# EAGLE board RoboKit (EAGLE 9.6.2)
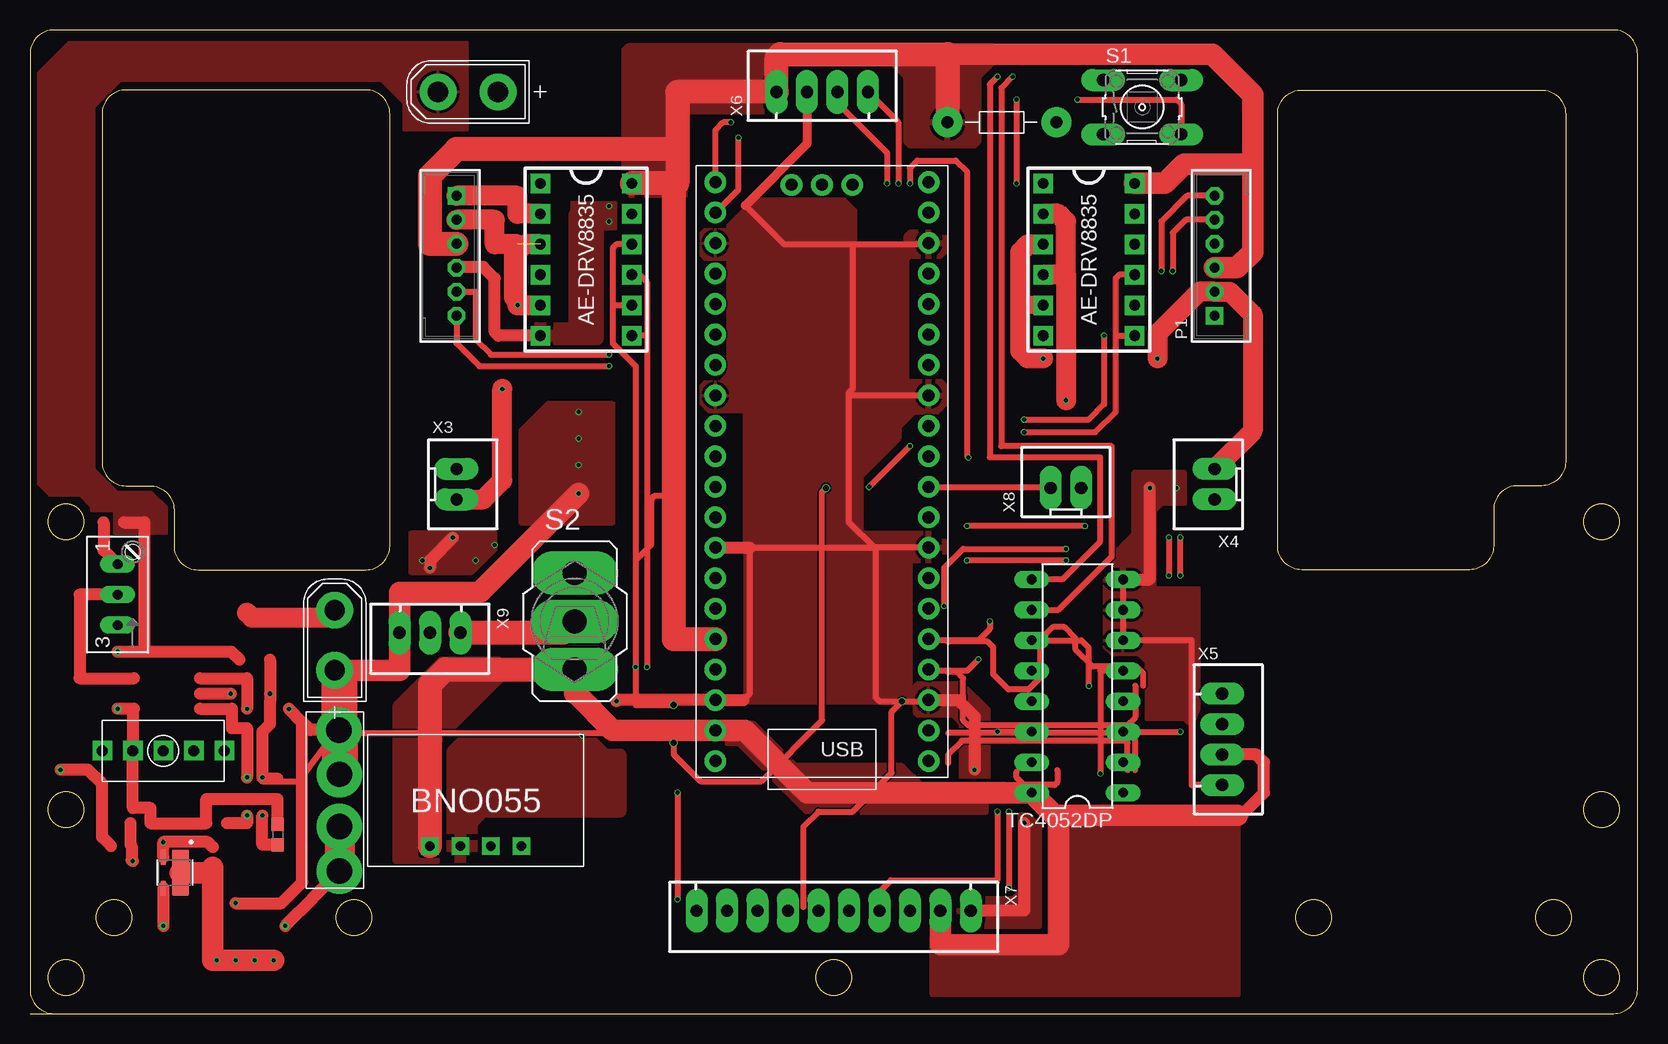
[diagram p0: board, top side]
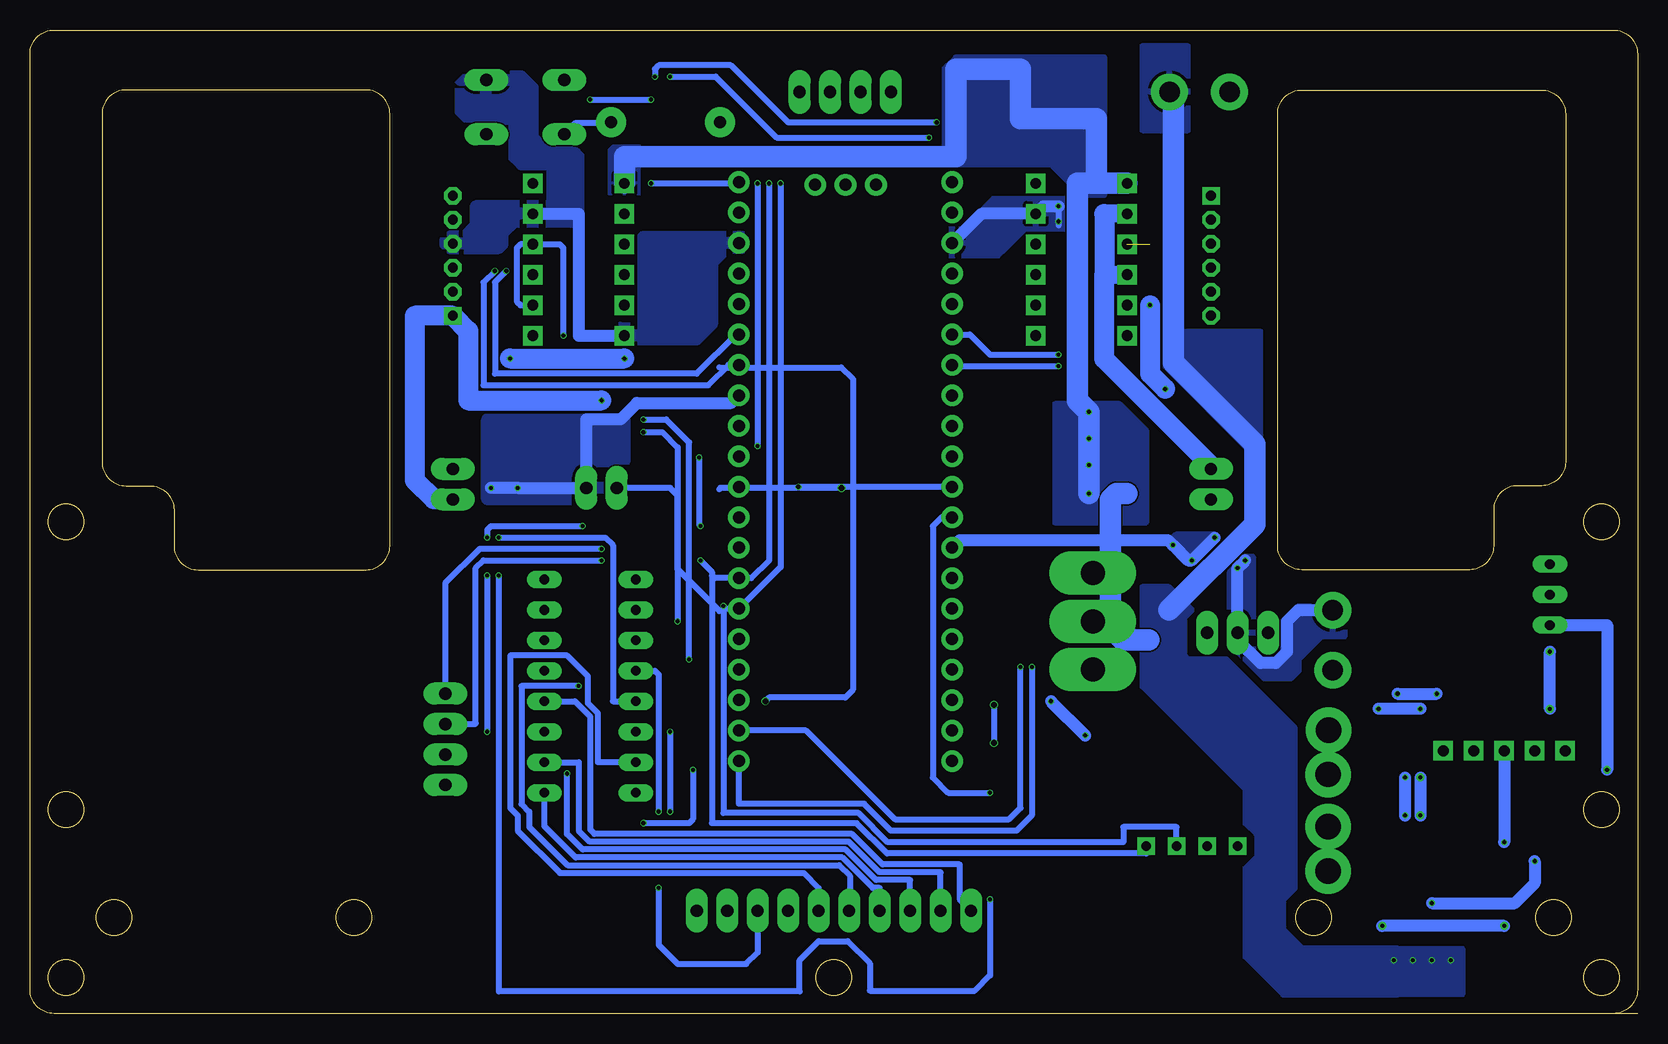
[diagram p1: board, bottom side, seen from below]

Size 134 x 82 mm. Coordinates in mm from the lower left corner, seen from the top.
Outline: 132,0 arc90 134,2
Outline: 134,80 arc90 132,82
Outline: 2,82 arc90 0,80
Outline: 0,2 arc90 2,0
Outline: 2,0 132,0
Outline: 132,0 arc90 134,2
Outline: 134,2 134,80
Outline: 134,80 arc90 132,82
Outline: 132,82 2,82
Outline: 2,82 arc90 0,80
Outline: 0,80 0,2
Outline: 0,2 arc90 2,0
Outline: 0,0 2,0
Outline: 10,44 arc-90 12,42 12,39 arc90 14,37 28,37 arc90 30,39 30,75 arc90 28,77 8,77 arc90 6,75 6,46 arc90 8,44 10,44
Outline: 124,44 arc90 122,42 122,39 arc-90 120,37 106,37 arc-90 104,39 104,75 arc-90 106,77 126,77 arc-90 128,75 128,46 arc-90 126,44 124,44
Outline: circle at 3,3 radius 1.5
Outline: circle at 131,3 radius 1.5
Outline: circle at 3,17 radius 1.5
Outline: circle at 131,17 radius 1.5
Outline: circle at 3,41 radius 1.5
Outline: circle at 131,41 radius 1.5
Outline: circle at 3,3 radius 1.5
Outline: circle at 131,3 radius 1.5
Outline: circle at 3,17 radius 1.5
Outline: circle at 131,17 radius 1.5
Outline: circle at 3,41 radius 1.5
Outline: circle at 131,41 radius 1.5
Outline: circle at 67,3 radius 1.5
Outline: circle at 107,8 radius 1.5
Outline: circle at 127,8 radius 1.5
Outline: circle at 27,8 radius 1.5
Outline: circle at 7,8 radius 1.5
Copper layers (1*16): Top 0.035mm / dielectric 1.6mm / Bottom 0.035mm
Design rules "jlcpcb-2layers": minimum track width 5mil, minimum drill 0.3mm, track to track 5mil, track to pad 5mil, pad to pad 5mil, via to via 5mil, smd to smd 5mil, copper to edge 0.2mm, drill to drill 6mil, minimum pad ring 10mil, minimum via ring 3mil, stop-mask expansion 4mil, vias tented up to drill 0mil, thermal gap 10mil
Net classes: 0 default: width 0.5 mm; 2 power: width 1 mm, drill 0.102 mm

## Footprints (pad centres in the part's own frame; a part is rotated, then mirrored left to right if it is on the bottom)
0603 = smd 1.1 x 1: 1 -0.85,0; 2 0.85,0
XT30UPB-M = drill 1.7: + 2.5,0; - -2.5,0
RESISTER_SOCKET = drill 1 pad 2.5: 1 -4.5,0; 2 4.58,0
B6B-PH-K = drill 0.813 square: 1 -5,0 | drill 0.813 octagon: 2 -3,0; 3 -1,0; 4 1,0; 5 3,0; 6 5,0
S64W = drill 0.813 long: A 2.54,1.27; E -2.54,1.27; S 0,1.27
B3F-10XX = drill 1.016 long: 1 -3.251,2.261; 2 3.251,2.261; 3 -3.251,-2.261; 4 3.251,-2.261
320-916 = drill 2.007 long: 1 0,4.013; 2 0,0; 3 0,-4.013
DIL16 = drill 0.813 long: 1 -8.89,-3.81; 2 -6.35,-3.81; 3 -3.81,-3.81; 4 -1.27,-3.81; 5 1.27,-3.81; 6 3.81,-3.81; 7 6.35,-3.81; 8 8.89,-3.81; 9 8.89,3.81; 10 6.35,3.81; 11 3.81,3.81; 12 1.27,3.81; 13 -1.27,3.81; 14 -3.81,3.81; 15 -6.35,3.81; 16 -8.89,3.81
SSM6J808R = smd 3.8 x 1.4: D 0,0.475 | smd 1.26 x 0.42: G -1.285,-0.95; S 1.285,-0.95
FT_RASPBERRY-PI-PICO_TH = drill 1: 1 -8.55,24.03; 2 -8.55,21.49; 3 -8.55,18.95; 4 -8.55,16.41; 5 -8.55,13.87; 6 -8.55,11.33; 7 -8.55,8.79; 8 -8.55,6.25; 9 -8.55,3.71; 10 -8.55,1.17; 11 -8.55,-1.37; 12 -8.55,-3.91; 13 -8.55,-6.45; 14 -8.55,-8.99; 15 -8.55,-11.53; 16 -8.55,-14.07; 17 -8.55,-16.61; 18 -8.55,-19.15; 19 -8.55,-21.69; 20 -8.55,-24.23; 21 9.23,-24.23; 22 9.23,-21.69; 23 9.23,-19.15; 24 9.23,-16.61; 25 9.23,-14.07; 26 9.23,-11.53; 27 9.23,-8.99; 28 9.23,-6.45; 29 9.23,-3.91; 30 9.23,-1.37; 31 9.23,1.17; 32 9.23,3.71; 33 9.23,6.25; 34 9.23,8.79; 35 9.23,11.33; 36 9.23,13.87; 37 9.23,16.41; 38 9.23,18.95; 39 9.23,21.49; 40 9.23,24.03; GND 0.34,-24; SWCLK -2.2,-24; SWDIO 2.88,-24
AE-DRV8835 = drill 0.9 square: AOUT1 -3.81,3.81; AOUT2 -3.81,-1.27; BOUT1 -3.81,1.27; BOUT2 -3.81,-3.81; GND -3.81,-6.35; INA1 3.81,1.27; INA2 3.81,-3.81; INB1 3.81,-1.27; INB2 3.81,-6.35; MODE 3.81,3.81; VCC 3.81,6.35; VIN -3.81,6.35
AE-BNO055-BO = drill 0.8 square: GND -1.27,-3.81; SCL 3.81,-3.81; SDA 1.27,-3.81; VIN -3.81,-3.81
FUSE = drill 2.1: 1 -5.85,0.35; 2 -2.15,0.4; 3 2.2,0.4; 4 5.9,0.4
SW = drill 0.9 square: 1 0,2.54; 2 0,0; 3 0,-2.54; NC 0,5.08; NC2 0,-5.08
JST-XH-02-PACKAGE-LONG-PAD = drill 1.016 long: 1 -1.27,0; 2 1.27,0
JST-XH-04-PACKAGE-LONG-PAD = drill 1.016 long: 1 -3.81,0; 2 -1.27,0; 3 1.27,0; 4 3.81,0
JST-XH-10-PACKAGE-LONG-PAD = drill 1.016 long: 1 -11.43,0; 2 -8.89,0; 3 -6.35,0; 4 -3.81,0; 5 -1.27,0; 6 1.27,0; 7 3.81,0; 8 6.35,0; 9 8.89,0; 10 11.43,0
JST-XH-03-PACKAGE-LONG-PAD = drill 1.016 long: 1 -2.54,0; 2 0,0; 3 2.54,0

## Placement (x,y rotation side)
C2  1uF  [C0603]  9.21,15.88 0 top
C7  0.1uF  [0603]  20.64,14.92 270 top
C11  1uF  [C0603]  15.56,15.88 180 top
CON1  XT30UPB-M  [XT30UPB-M]  25.4,31.11 270 top
CON2  XT30UPB-M  [XT30UPB-M]  36.51,76.83 0 top
CONNECTOR1  RESISTER  [RESISTER_SOCKET]  80.96,74.3 0 top
P1  B6B-PH-K  [B6B-PH-K]  98.74,63.18 90 top
P2  B6B-PH-K  [B6B-PH-K]  35.56,63.18 270 top
R1  20k  [0603']  7.62,13.97 0 top
R2  10k  [0603']  20.64,18.73 90 top
R3  2k  [0603']  6.99,40.96 0 top
R4  20k  [0603']  15.24,13.02 270 top
R5  1k  [S64W]  8.57,34.92 90 top
S1  [B3F-10XX]  92.71,75.56 0 top
S2  [320-916]  45.4,32.7 0 top
TC4052DP  [DIL16]  87.31,27.3 90 top
U1  SSM6J808R  [SSM6J808R]  12.06,11.75 270 top
U$1  RASPBERRY-PI-PICO_TH  [FT_RASPBERRY-PI-PICO_TH]  66.36,45.09 180 top
U$2  AE-DRV8835  [AE-DRV8835]  46.35,62.87 0 top
U$3  AE-DRV8835  [AE-DRV8835]  88.27,62.87 0 top
U$4  [AE-BNO055-BO]  37.15,17.78 0 top
U$5  M51957  [SOP-8]  11.43,27.3 0 top
U$6  BSC093N04LSGATMA1  [MOSFET_BSC093N04LSGATMA1]  18.1,32.38 0 top
U$7  FUSE  [FUSE]  25.4,17.78 270 top
U$9  SW  [SW]  11.11,21.91 90 top
X3  JST-XH-02-PIN-LONG-PAD  [JST-XH-02-PACKAGE-LONG-PAD]  35.56,44.13 270 top
X4  JST-XH-02-PIN-LONG-PAD  [JST-XH-02-PACKAGE-LONG-PAD]  98.74,44.13 90 top
X5  JST-XH-04-PIN-LONG-PAD  [JST-XH-04-PACKAGE-LONG-PAD]  99.38,22.86 270 top
X6  JST-XH-04-PIN-LONG-PAD  [JST-XH-04-PACKAGE-LONG-PAD]  66.04,76.83 0 top
X7  JST-XH-10-PIN-LONG-PAD  [JST-XH-10-PACKAGE-LONG-PAD]  66.99,8.57 180 top
X8  JST-XH-02-PIN-LONG-PAD  [JST-XH-02-PACKAGE-LONG-PAD]  86.36,43.81 0 top
X9  JST-XH-03-PIN-LONG-PAD  [JST-XH-03-PACKAGE-LONG-PAD]  33.34,31.75 180 top

## Library data of the parts
C2 C11 CONNECTOR1 = resistor
C7 = SparkFun-Capacitors; PROD_ID: CAP-08280
CON1 CON2 = XTn0 amass
P1 P2 = con-jst-ph
R1 R4 = SparkFun-Resistors; PROD_ID: RES-00824
R2 R3 = SparkFun-Resistors; PROD_ID: RES-07856
R5 = Values of parts
S1 = switch-omron; MPN: B3F-1000; OC_FARNELL: 176432; OC_NEWARK: 36M3542
S2 = switch
TC4052DP = ic-package
U1 = SSM6J808R; A1_MIN: 0.8; A_MAX: 0.8; A_MIN: 0.8; A_NOM: 0.8; B_MAX: 0.41; B_MIN: 0.43; B_NOM: 0.42; D2_MAX: 0.0; D_MAX: 2.7; D_MIN: 3.1; D_NOM: 2.9; E1_MAX: 2.1; E1_MIN: 2.3; E1_NOM: 2.2; E2_MAX: 0.0; ENOM: 0.95; E_MAX: 2.7; E_MIN: 2.9; E_NOM: 2.8; L_MAX: 0.4; L_MIN: 0.2; L_NOM: 0.3; MANUFACTURER: Toshiba; PIN_COUNT: 6.0; STANDARD: IPC 7351B
U$1 = pipico
U$2 U$3 = AE-DRV8835
U$4 = AE-BNO055
U$5 = M51957B
U$6 = MOSFET_BSC093N04LSGATMA1
U$7 = fuse
U$9 = akizuki sw
X3-X9 = Rembrandt Electronics - JST XH Connectors v1-0

## Nets
0X: TC4052DP.12 X7.3
0Y: TC4052DP.1 X7.7
1X: TC4052DP.14 X7.4
1Y: TC4052DP.5 X7.8
2X: TC4052DP.15 X7.5
2Y: TC4052DP.2 X7.9
3V3 [power]: CONNECTOR1.1 P1.3 P2.3 U$1.36 U$2.VCC U$3.VCC X6.1
3V3_EN [power]: U$1.37
3X: TC4052DP.11 X7.6
3Y: TC4052DP.4 X7.10
5.0V [power]: S2.2 X9.1
A: TC4052DP.10 U$1.21
ANALOG: U$1.34 X1.3
B: TC4052DP.9 U$1.22
GND: CON1.- P1.4 P2.4 S1.2 TC4052DP.6 TC4052DP.7 TC4052DP.8 U$1.3 U$1.8 U$1.13 U$1.18 U$1.23 U$1.28 U$1.33 U$1.38 U$2.GND U$2.MODE U$3.GND U$3.MODE U$4.GND U$6.D X5.4 X6.2 X7.1 X8.2 X9.2
HALL_A_L: P2.5 U$1.26
HALL_A_R: P1.5 U$1.14
HALL_B_L: P2.6 U$1.27
HALL_B_R: P1.6 U$1.15
IO0: U$1.1 U$2.INA1 U$2.INA2
IO1: U$1.2 U$2.INB1 U$2.INB2
IO2: U$1.4 U$3.INA1 U$3.INA2
IO3: U$1.5 U$3.INB1 U$3.INB2
IO6: U$1.9
IO7: U$1.10 X8.1
IO8: U$1.11
IO9: U$1.12
IO12: U$1.16
IO12: U$1.16
IO13: U$1.17
IO14: R2.2 U$1.19
IO15: S1.4 U$1.20
IO16: U1.10 U$1.21
IO17: U1.11 U$1.22
IO18: U1.14 U$1.24
IO19: U1.13 U$1.25
IO20: U$1.26 X8.1
IO21: U$1.29
MOTOR_A_L: P2.1 U$2.AOUT1 U$2.AOUT2 X3.1
MOTOR_A_R: P1.1 U$3.AOUT1 U$3.AOUT2 X4.1
MOTOR_B_L: P2.2 U$2.BOUT1 U$2.BOUT2 X3.2
MOTOR_B_R: P1.2 U$3.BOUT1 U$3.BOUT2 X4.2
N$1: R5.S U$5.IN
N$1: C2.2 C11.2 CON2.- LED1.A R2.1 R3.2 U$9.1
N$2: R3.1 R5.A
N$2: CONNECTOR1.2 S2.3
N$3: R1.1 R5.E
N$4: CONNECTOR1.2 S1.3
N$5: C11.1 U$5.C
N$6: C7.2 R2.2 U$5.OUT U$6.GATE
N$7: R4.1 U1.G U$9.2
N$11: U1.23
N$12: U1.22
N$13: U1.21
N$14: U1.20
N$15: U1.19
N$16: U1.18
N$17: U1.17
N$18: U1.16
N$19: CONNECTOR4.2 U1.1
RUN: S3.4 U$1.30
SCL: U$1.7 U$4.SCL X5.2 X6.4
SDA: U$1.6 U$4.SDA X5.1 X6.3
V_HIGH [power]: U1.S U$7.3 U$7.4
VBUS [power]: U$1.40
VIN [power]: CON2.+ R4.2 U1.D
VOUT [power]: C2.1 CON1.+ R1.2 U$2.VIN U$3.VIN U$5.V U$7.1 U$7.2 X9.3
VSYS [power]: S2.3 TC4052DP.16 U$1.39 U$4.VIN X5.3 X7.2
X-COM: TC4052DP.13 U$1.32
Y-COM: TC4052DP.3 U$1.31

## Tracks (layer width: path | path; a pad name or v marks a point on that pad's centre or on a via)
0X  (via drill 0.35)
  Top 0.5: v81.6,16.83 v81.6,10.48
  Bottom 0.5: TC4052DP.12 81.92,28.57 81.6,28.26 v81.6,16.83 | X7.3 73.34,5.08 74.3,4.13 80.01,4.13 81.6,5.71 v81.6,10.48
0Y
  Bottom 0.5: X7.7 63.18,10.47 63.73,10.47 66.27,13.02 88.52,13.02 91.12,15.62 TC4052DP.1
1X  (via drill 0.35)
  Top 0.5: TC4052DP.14 v80.64,23.5 | v80.64,16.83 80.64,11.11 71.75,11.11 70.8,10.16 X7.4
  Bottom 0.5: v80.64,23.5 v80.64,16.83
1Y  (via drill 0.35)
  Top 0.5: TC4052DP.5 89.22,28.57 v89.22,20
  Bottom 0.5: X7.8 60.64,11.13 63.46,11.13 66,13.67 87.93,13.67 89.23,14.97 89.23,19.98 v89.22,20
2X
  Bottom 0.5: TC4052DP.15 86.66,20.95 86.66,25.04 87.48,25.86 87.48,28.11 89.22,29.84 93.96,29.84 93.96,17.13 93.34,16.51 93.34,15.24 89.82,11.71 69.5,11.71 68.26,10.48 X7.5
2Y
  Bottom 0.5: X7.9 58.1,11.75 58.13,11.78 63.19,11.78 65.73,14.32 87.34,14.32 88.27,15.24 88.27,20.95 TC4052DP.2
3V3
  Top 1.8: 101.92,70.8 96.2,70.8 94.61,69.22 U$3.VCC | 76.52,79.98 98.55,79.98 101.92,76.62 101.92,70.8 | P1.3 100.6,62.18 101.92,63.5 101.92,70.8
  Top 2: 53.98,72.07 53.98,76.83 X6.1 62.23,79.69 62.52,79.98 76.52,79.98 76.52,74.35 CONNECTOR1.1 | 53.98,72.07 53.98,69.22 53.66,69.22 | 53.66,69.22 53.66,31.21 U$1.36 | 53.66,69.22 U$2.VCC | 53.98,72.07 35.56,72.07 33.34,69.85 33.34,64.18 P2.3
  pour Top: 49.53,68.26 54.61,68.26 54.61,75.25 62.87,75.25 62.87,80.64 49.85,80.64 49.53,80.33
  pour Top: 71.75,80.64 71.75,79.38 72.39,78.74 73.03,78.11 73.03,72.71 73.34,72.39 78.74,72.39 79.06,72.71 79.06,78.11 80.33,79.38 80.33,80.64
3X  (via drill 0.35)
  Top 0.5: v88.27,27.3 88.27,30.48 87.63,31.11 TC4052DP.11
  Bottom 0.5: v88.27,27.3 93.03,27.3 93.03,17.46 92.39,16.83 92.39,15.56 89.2,12.36 66.54,12.36 65.67,11.49 65.67,8.63 X7.6
3Y
  Bottom 0.5: X7.10 56.52,9.53 56.52,12.43 62.92,12.43 65.46,14.97 86.94,14.97 87.31,15.34 87.31,24.77 88.58,26.04 TC4052DP.4
5.0V
  Top 2: S2.2 44.45,31.75 X9.1
A  (via drill 0.35)
  Top 0.5: v81.92,78.11 80.96,77.15 80.96,47.31 90.17,47.31 90.17,38.1 85.72,33.66 TC4052DP.10 | v58.42,74.3 57.78,74.3 57.13,73.64 U$1.21
  Bottom 0.5: v81.92,78.11 81.92,78.74 81.6,79.06 75.56,79.06 70.8,74.3 v58.42,74.3
ANALOG  (via drill 0.5)
  Top 0.48: 64.45,15.56 64.45,8.89
  Top 0.5: 64.45,15.56 65.72,16.83 68.58,16.83 71.83,20.08 71.83,25.16 v72.71,26.04
  Bottom 0.48: 76.54,53.88 66.36,53.88
  Bottom 0.5: 66.36,53.88 65.41,52.92 65.41,26.98 66.04,26.34 72.4,26.34 v72.71,26.04
B  (via drill 0.35)
  Top 0.5: U$1.22 59.05,68.7 v59.05,73.03 | v80.64,78.11 80.01,77.47 80.01,46.35 89.22,46.35 89.22,39.37 86.04,36.2 TC4052DP.9
  Bottom 0.5: v80.64,78.11 76.83,78.11 71.75,73.03 v59.05,73.03
GND  (via drill 0.35)
  Top 0.5: 59.63,67.37 62.87,64.14 68.58,64.14 | U$1.18 74.81,64.14 68.58,64.14 | 68.58,64.14 68.58,52.07 68.26,51.75 | U$1.13 68.48,51.53 68.26,51.75 | U$1.8 70.39,38.84 | 70.39,38.84 68.26,40.96 68.26,51.75 | 70.39,38.84 60.01,38.84 60.01,26.67 59.47,26.14 | 70.39,38.84 70.48,38.73 70.48,26.35 70.8,26.04 74.81,26.04 U$1.3 | X5.4 96.84,19.05 96.84,31.11 TC4052DP.6 TC4052DP.8
  Top 0.75: 59.63,67.37 64.77,72.51 X6.2
  Top 1: U$2.GND 39.05,56.52 38.73,56.83 38.73,61.28 37.78,62.23 35.61,62.23 P2.4 | TC4052DP.8 93.34,36.2 v93.34,43.81 | v48.9,26.04 48.99,26.14 U$1.38 59.47,26.14 | U$1.3 77.37,26.14 78.74,24.77 v78.74,20.32 | v82.87,15.88 82.87,8.57 X7.1 | v33.34,37.15 33.34,37.78 v35.24,39.69 | U$1.33 60.01,38.84
  Top 1.65: 18.1,33.44 18.51,33.02 24.8,33.02 CON1.-
  Bottom 0.5: v78.74,20.32 78.74,16.19 79.06,15.88 v82.87,15.88 | v48.26,67.31 v48.26,66.04 48.26,65.72
  Bottom 1: U$3.MODE 88.27,66.67 88.27,56.52 U$3.GND | U$1.23 54.69,66.67 U$2.MODE 49.53,67.31 v48.26,67.31 | U$1.33 56.49,39.47 39.15,39.47 v38.73,39.05 37.47,37.78 v37.15,37.78 v35.24,39.69 | CON1.- 28.3,33.62 29.21,32.7 29.21,30.16 30.16,29.21 31.43,29.21 33.34,31.11 X9.2 v33.34,37.15 v32.7,37.78 | v48.9,26.04 v46.04,23.18 | U$1.13 75.54,50.9 83.4,50.9 84.77,49.53 87.63,49.53 X8.2 v93.34,43.81 v95.57,43.81
  pour Top: 55.88,64.77 55.88,63.18 56.2,62.87 58.1,62.87 58.1,53.34 57.78,53.02 57.47,52.7 56.2,52.7 55.88,52.39 55.88,50.8 56.52,50.16 59.05,50.16 68.9,50.16 68.9,66.99 67.94,67.94 60.33,67.94 59.05,66.67 58.1,65.72 58.1,65.41 56.2,65.41 55.88,65.09
  pour Top: 96.84,23.81 96.2,24.45 93.03,24.45 93.03,29.21 92.39,29.84 90.17,29.84 89.53,30.48 89.53,36.2 90.17,36.83 92.08,36.83 92.39,36.51 93.34,35.56 97.47,35.56 97.47,25.4
  pour Bottom: 88.58,71.75 90.81,71.75 92.08,73.03 92.08,77.15 93.03,78.11 97.47,78.11 98.11,77.47 98.11,75.25 97.47,74.61 93.66,74.61 93.66,71.44 93.03,70.8 90.49,70.8 90.49,67.63 90.81,67.31 92.71,67.31 93.03,66.99 93.03,66.36 92.71,66.04 88.27,66.04 88.27,71.44
  pour Bottom: 91.12,67.31 96.84,67.31 96.84,65.72 97.79,64.77 99.06,64.77 99.38,64.45 99.38,64.14 99.06,63.82 94.93,63.82 94.61,64.14 94.61,65.09 93.66,66.04 91.12,66.04
  pour Bottom: 78.42,56.2 84.77,56.2 84.77,57.15 83.5,57.15 82.87,57.78 82.87,64.77 74.61,64.77 74.61,63.82 75.88,63.82 77.15,62.55 77.15,57.47
  pour Bottom: 86.68,46.04 86.68,42.86 95.89,42.86 95.89,49.53 84.45,49.53 84.45,46.04
  pour Top: 45.4,66.67 47.31,66.67 47.31,56.2 42.23,56.2 42.23,57.15 45.4,57.15
  pour Top: 35.24,13.02 35.24,21.91 39.37,26.04 39.69,26.35 43.18,26.35 47.94,21.59 49.21,21.59 49.21,16.83 37.78,16.83 36.83,15.88 36.83,13.02
  pour Top: 77.47,8.57 77.47,7.3 84.14,7.3 84.14,15.56 83.19,16.51 82.55,16.51 82.55,10.16 81.92,9.53 77.47,9.53
  pour Top: 89.68,35.56 90.05,37.98 92.08,40.01 92.08,45.09 96.2,45.09 96.2,42.55 94.3,42.55 93.66,41.91 93.66,35.56
  pour Top: 73.66,27.3 73.66,25.08 73.98,24.77 76.83,24.77 77.47,24.13 77.47,19.68 80.01,19.68 80.01,25.4 77.79,27.62 73.98,27.62
  pour Bottom: 24.45,31.43 26.35,31.43 28.26,29.53 28.26,28.57 28.89,27.94 31.11,27.94 33.97,30.8 33.97,36.83 32.7,38.1 32.07,38.1 32.07,30.16 31.43,29.53 30.48,29.53 30.16,29.53 29.53,30.16 29.53,32.7 28.26,33.97 24.45,33.97
  pour Top: 31.75,36.83 36.83,36.83 38.73,38.73 38.73,40.01 31.75,40.01
  pour Bottom: 46.99,65.41 51.12,65.41 52.7,63.82 53.34,63.18 57.78,63.18 57.78,65.41 56.2,65.41 53.66,67.94 46.99,67.94
  pour Bottom: 38.42,39.69 38.42,38.73 37.47,37.78 37.15,37.78 35.24,39.69
  pour Top: 65.41,64.14 73.03,64.14 73.03,51.44 73.03,49.85 65.09,49.85 65.09,63.82
  pour Top: 73.03,52.7 75.88,52.7 76.2,52.39 76.2,51.12 76.2,50.8 75.88,50.48 75.56,50.16 73.66,50.16 73.34,49.85 72.71,49.85 72.71,52.7
  pour Top: 73.03,62.87 73.34,63.18 75.88,63.18 76.2,63.5 76.2,64.77 75.88,65.09 73.34,65.09 73.03,64.77
  pour Top: 68.58,50.16 73.66,50.16 72.39,48.9 72.39,47.94 69.22,44.77 69.22,38.73 59.69,38.73 59.69,50.16
  pour Top: 69.53,40.01 75.56,40.01 76.2,39.37 76.2,38.42 75.56,37.78 69.53,37.78
  pour Top: 59.69,38.73 59.69,26.04 73.34,26.04 73.34,38.73
  pour Top: 45.09,67.63 45.09,65.41 48.9,65.41 48.9,67.63
HALL_A_L  (via drill 0.35)
  Top 0.5: P2.5 37.15,60.18 37.15,56.2 38.42,54.93 v48.26,54.93
  Bottom 0.5: U$1.26 55.66,56.62 53.98,54.93 v48.26,54.93
HALL_A_R  (via drill 0.35)
  Top 0.5: v95.25,61.91 95.25,65.09 96.34,66.18 P1.5
  Bottom 0.5: U$1.14 75.78,54.08 77.47,52.39 96.2,52.39 96.2,60.96 v95.25,61.91
HALL_B_L  (via drill 0.35)
  Top 0.5: P2.6 35.56,55.88 37.47,53.98 v48.26,53.98
  Bottom 0.5: U$1.27 57.03,53.98 v48.26,53.98
HALL_B_R  (via drill 0.35)
  Top 0.5: v94.3,61.91 94.3,66.04 96.44,68.18 P1.6
  Bottom 0.5: U$1.15 75.15,56.62 78.42,53.34 95.25,53.34 95.25,60.96 v94.3,61.91
IO0  (via drill 0.35)
  Top 0.5: U$2.INA1 48.9,64.14 48.58,63.82 48.58,59.05 | 48.58,59.05 U$2.INA2 | 48.58,59.05 48.58,55.88 50.48,53.98 v50.48,28.89
  Bottom 0.5: v50.48,28.89 50.48,16.51 51.75,15.24 62.23,15.24 64.47,17.48 74.91,17.48 U$1.1
IO1  (via drill 0.35)
  Top 0.5: U$2.INB1 50.8,61.59 51.44,60.96 51.44,56.52 | 51.44,56.52 U$2.INB2 | 51.44,56.52 v51.44,28.89
  Bottom 0.5: U$1.2 69.31,23.59 61.91,16.19 52.39,16.19 51.44,17.14 v51.44,28.89
IO2  (via drill 0.35)
  Top 0.5: v89.53,56.52 89.53,50.8 88.27,49.53 v82.87,49.53 | v79.06,29.53 78.11,28.57 75.01,28.57 U$1.4
  Bottom 0.5: U$3.INA2 93.11,59.05 93.43,59.37 93.43,63.82 93.11,64.14 U$3.INA1 89.85,64.14 89.53,63.82 v89.53,56.52 | v82.87,49.53 80.96,49.53 79.06,47.62 v79.06,29.53
IO3  (via drill 0.35)
  Top 0.5: U$3.INB1 90.81,61.59 90.49,61.28 90.49,56.52 | 90.49,56.52 U$3.INB2 | v82.87,48.46 88.78,48.46 90.49,50.16 90.49,56.52 | v80.01,32.7 80.01,32.07 79.06,31.11 75.01,31.11 U$1.5
  Bottom 0.5: v82.87,48.46 81.28,48.46 80.01,47.19 v80.01,32.7
IO7
  Top 0.5: U$1.10 84.99,43.91 X8.1
IO14
  Top 0.5: 58.76,23.39 33.97,23.39 33.69,23.39 25.4,23.39 22.38,19.37 20.54,19.37
IO15  (via drill 0.35)
  Top 0.5: v82.23,76.2 v82.23,69.22 | v87.31,76.2 95.57,76.2 95.96,75.81 S1.4
  Bottom 0.5: v82.23,69.22 75.01,69.22 | v87.31,76.2 v82.23,76.2
  Bottom 1: 75.01,69.22 U$1.20
IO16
  Top 0.48: 91.49,20.31 91.49,22.56 91.31,22.73 77.69,22.73 76.54,21.59 76.54,20.86
IO17
  Top 0.48: 92.14,20.31 92.14,22.79 91.54,23.39 76.54,23.39
IO18
  Top 0.48: 92.14,27.32 92.14,24.7 91.44,24 78.23,24 77.79,24.45 77.79,25.39 77.81,25.41 77.81,26.46 77.79,26.48 77.79,27.94 77.25,28.48 76.54,28.48
IO19
  Top 0.48: 92.79,27.32 92.79,28.36 92.23,28.92 88.59,28.92 87.17,30.34 87.17,31.26 86.21,32.21 85.27,32.21 84.17,31.11 84.17,27.96 83.22,27.01 81.56,27.01 80.3,28.28 80.3,30.51 79.79,31.02 76.54,31.02
IO20
  Bottom 0.5: 76.54,33.55 80.03,37.05 80.03,43.18 80.64,43.81 X8.1
MOTOR_A_L
  Top 1.65: U$2.AOUT1 40.64,66.67 40.64,68.18 P2.1
  Bottom 1.5: U$2.AOUT1 44.45,66.67 | 44.45,61.59 U$2.AOUT2
  Bottom 1.65: 44.45,66.67 44.45,61.59 44.45,54.57 35.56,45.68 X3.1
MOTOR_A_R  (via drill 0.35)
  Top 1.65: 86.36,61.59 v86.36,51.12 | 86.36,61.59 U$3.AOUT2 | 86.36,61.59 86.36,66.04 85.72,66.67 U$3.AOUT1
  Bottom 1.65: X4.1 100.33,42.86 101.92,44.45 101.92,58.18 P1.1 97.47,56.91 97.47,51.12 v86.36,51.12
MOTOR_B_L  (via drill 0.35)  (1 unrouted)
  Top 1.65: U$2.BOUT1 41.27,64.14 40.32,63.18 40.32,59.69 40.64,59.37 v40.64,59.05 U$2.BOUT2 | 40.64,64.14 38.73,64.14 38.73,66.18 P2.2 | X3.2 37.78,42.86 39.37,44.45 v39.37,52.07
  Bottom 1.65: v40.64,59.05 40.64,53.34 v39.37,52.07
MOTOR_B_R  (via drill 0.35)
  Top 1.5: U$3.BOUT2 82.55,59.05
  Top 1.65: X4.2 101.92,48.58 101.92,58.28 100.01,60.18 P1.2 97.47,60.18 93.98,56.69 v93.98,54.61 | v84.45,54.61 83.19,54.61 82.55,55.24 82.55,59.05 82.55,63.5 83.19,64.14 U$3.BOUT1
  Bottom 1.65: v93.98,54.61 v84.45,54.61
N$1
  Top 1: R5.S 4.13,34.92 4.13,27.94 8.68,27.94
N$1  (via drill 0.35 pad 0.65)
  Top 1: 20.64,15.77 20.64,17.88 14.71,17.88 14.71,15.88 10.06,15.88 10.06,17.14 8.57,17.14 U$9.1 8.57,25.29 8.68,25.4 v7.3,25.4 | 7.83,40.96 9.53,40.96 9.53,30.16 | 9.53,30.16 16.79,30.16 17.46,29.49 | 9.53,30.16 v7.3,30.16
  Bottom 1: v7.3,25.4 v7.3,30.16
  pour Top: 1.59,43.18 4.13,43.18 5.08,42.23 5.08,41.91 6.99,41.91 6.99,40.01 11.43,40.01 11.43,42.23 10.16,43.5 7.3,43.5 5.4,45.4 5.4,75.56 7.62,77.79 29.21,77.79 31.11,75.88 31.11,73.66 36.51,73.66 36.51,80.96 3.17,80.96 0.64,78.42 0.64,44.13
N$2
  Top 1: 6.13,40.96 6.13,38.63 R5.A
N$2
  Bottom 1.8: 40.74,31.17 42.91,31.17 43.95,32.2 43.95,42.86 43.45,43.36 42.55,43.36
N$3  (via drill 0.35 pad 0.65)
  Top 1: 6.77,13.97 6.02,14.72 6.02,19.13 4.83,20.32 v2.54,20.32
  Bottom 1: R5.E 2.54,32.38 v2.54,20.32
N$4
  Bottom 0.5: S1.3 88.51,74.26 85.58,74.26 CONNECTOR1.2
N$5  (via drill 0.35 pad 0.65)
  Top 1: 14.18,25.4 16.83,25.4 16.83,23.81 18.1,23.81 v18.1,19.68 | 16.41,15.88 18.1,15.88 v18.1,16.51
  Bottom 1: v18.1,19.68 v18.1,16.51
N$6  (via drill 0.35)
  Top 1: 20.64,19.58 19.47,19.58 v19.37,19.68 19.37,23.5 20,24.13 20,26.04 v20,26.66 20,29.48 | C7.2 19.37,14.07 v19.37,16.51 | v16.73,26.66 14.19,26.66 14.18,26.67
  Bottom 1: v19.37,16.51 v19.37,19.68 | v20,26.66 v16.73,26.66
N$7  (via drill 0.35)
  Top 1: 15.24,13.87 14.81,14.3 11.12,14.3 v11.11,14.29 v11.12,14.29 U1.G
  Bottom 1: U$9.2 v11.11,14.29
N$19
  Top 0.48: 85.64,20.31 85.64,19.29 85.41,19.05 82.87,19.05 82.23,19.68 82.23,20.18
RUN  (via drill 0.5)
  Top 0.5: 53.42,43.14 52.03,43.14 51.75,42.86 51.75,39.05 50.48,37.78 50.48,25.72 v53.66,25.72 | v53.66,22.54 53.66,21.59 55.88,19.37 60.96,19.37 66.04,24.45 66.04,43.5 v66.36,43.81
  Bottom 0.5: v53.66,25.72 v53.66,22.54 | v66.36,43.81 76.44,43.81 76.54,43.72
SCL  (via drill 0.35)
  Top 0.5: v86.36,37.78 v78.11,37.78 | X6.4 72.39,74.3 v72.39,69.22
  Bottom 0.5: U$4.SCL 40.96,13.34 62.55,13.34 65.09,15.88 77.15,15.88 77.15,36.51 | v72.39,69.22 72.39,37.78 73.88,36.3 U$1.7 76.94,36.3 77.15,36.51 | v78.11,37.78 77.15,36.83 77.15,36.51 | X5.2 96.92,24.13 96.84,24.21 96.84,37.15 96.2,37.78 v86.36,37.78
SDA  (via drill 0.35)
  Top 0.5: X6.3 67.31,75.88 71.44,71.75 v71.44,69.22 | v86.36,38.73 77.79,38.73 76.2,37.15 v76.2,33.97
  Bottom 0.5: U$4.SDA 38.42,15.56 42.86,15.56 42.86,14.29 62.51,14.29 64.93,16.71 76.2,16.71 v76.2,33.97 75.98,33.76 U$1.6 71.44,37.23 v71.44,69.22 | v86.36,38.73 96.52,38.73 99.38,35.88 X5.1
V_HIGH  (via drill 0.35 pad 0.65)
  Top 1: U1.S v11.12,7.3 v11.11,7.3 | v21.27,7.3 23.58,9.61 23.58,9.66 U$7.4
  Top 2.5: U$7.3 U$7.4
  Bottom 1: v11.11,7.3 v21.27,7.3
VIN  (via drill 0.35)
  Top 1.8: v20.32,4.45 v18.73,4.45 v17.14,4.45 v15.56,4.45 15.24,4.45 15.24,11.75 | 15.24,12.17 15.24,11.75 | U1.D 15.24,11.75
  Bottom 1.8: CON2.+ 38.7,76.52 38.7,54.25 31.92,47.47 31.92,40.79 39.05,33.66
  pour Bottom: 37.47,73.66 37.47,80.64 41.27,80.64 41.27,73.66
  pour Bottom: 20.64,5.4 14.61,5.4 14.61,1.59 20.95,1.59 20.95,5.08
  pour Bottom: 30.48,25.72 34.29,29.53 37.47,29.53 37.78,29.84 37.78,33.02 37.15,33.66 39.05,35.56 41.27,35.56 41.27,27.3 32.7,18.73 32.7,15.88 31.75,14.92 31.75,13.02 32.7,12.06 32.7,6.03 32.7,4.76 29.53,1.59 20,1.59 20,5.4 27.94,5.4 29.53,6.99 29.53,9.53 28.57,10.48 28.57,23.81
  pour Bottom: 32.38,46.99 31.43,46.99 31.43,56.83 39.37,56.83 39.37,53.98
VOUT  (via drill 0.35)
  Top 1: 14.18,27.94 18.1,27.94 v18.1,25.4 | v17.14,9.21 20.95,9.21 22.7,10.95 22.7,24.29 | v8.57,12.7 8.47,12.8 8.47,13.97 8.36,14.08 8.36,15.88 | 25.8,23.58 U$7.1 23.36,23.63 22.7,24.29 | 22.7,24.29 v21.59,25.4
  Top 1.8: v45.72,43.34 37.46,35.08 30.8,35.08 X9.3 30.8,28.61 CON1.+
  Top 3: CON1.+ 25.75,28.27 U$7.1 | 25.8,23.58 U$7.2
  Bottom 1: v8.57,12.7 8.57,10.87 10.23,9.21 v17.14,9.21 | v18.1,25.4 v21.59,25.4
  Bottom 1.8: U$3.VIN 84.45,71.44 56.83,71.44 56.83,78.74 51.44,78.74 51.44,74.61 45.09,74.61 45.09,69.22 | v45.72,43.34 v45.72,45.72 v45.72,47.94 v45.72,50.16 46.67,51.12 46.67,69.22 45.09,69.22 | U$2.VIN 45.09,69.22
  pour Top: 42.55,40.96 48.58,40.96 48.58,50.8 43.18,50.8 40.96,48.58 40.96,40.96
  pour Bottom: 43.18,50.8 48.58,50.8 48.58,40.96 40.96,40.96 40.96,48.58
  pour Bottom: 56.83,70.8 48.9,70.8 46.35,68.26 44.45,68.26 44.45,79.69 56.83,79.69 57.47,79.06 57.78,78.74 57.78,70.8
  pour Bottom: 83.19,68.26 85.72,68.26 85.72,72.07 85.41,72.39 83.19,72.39
VSYS
  Top 1: 100.65,16.51 100.97,16.51 102.87,18.41 102.87,20.95 102.23,21.59 X5.3
  Top 1.8: S2.3 45.4,26.67 45.5,26.67 48.58,23.59 U$1.39 59.59,23.59 64.77,18.41 TC4052DP.16 85.41,16.51 85.72,16.51 | 85.72,16.51 100.65,16.51 | 85.72,16.51 85.72,5.71 75.88,5.71 X7.2
  Top 2: U$4.VIN 33.34,27.42 34.61,28.69 S2.3
  pour Top: 100.65,16.19 100.65,1.59 75.25,1.59 75.25,6.35 85.09,6.35 86.04,7.3 86.04,16.19
  pour Top: 33.97,15.56 33.97,12.7 30.48,12.7 30.48,25.72 34.29,29.53 39.05,29.53 39.37,29.21 39.37,27.94 33.97,22.54
  pour Top: 58.1,24.45 58.1,22.54 59.05,22.54 64.77,16.83 79.69,16.83 79.69,18.1 81.28,18.1 81.28,19.05 74.3,19.05 72.71,20.64 63.82,20.64 60.33,24.13 58.42,24.13
X-COM  (via drill 0.35)
  Top 0.5: v53.98,18.41 v53.98,9.53 | v94.93,39.69 v94.93,36.51
  Bottom 0.5: TC4052DP.13 85.41,26.04 85.41,39.05 86.04,39.69 v94.93,39.69 | U$1.32 58,41.38 58.74,40.64 58.74,19.68 57.47,18.41 v53.98,18.41 | v53.98,9.53 53.98,3.17 55.24,1.91 63.98,1.91 63.98,4.18 65.84,6.03 68.26,6.03 69.85,4.45 69.85,1.83 94.93,1.83 94.93,29.21 v94.93,36.51
Y-COM  (via drill 0.35)
  Top 0.5: v73.34,47.31 v69.95,43.91 | v87.95,40.64 v78.11,40.64 | TC4052DP.3 v95.89,23.5 | v73.34,69.22 73.34,70.48 73.98,71.12 77.15,71.12 78.11,70.17 78.11,46.47 v78.22,46.35 | v95.89,36.51 v95.89,39.69
  Bottom 0.5: U$1.31 v69.95,43.91 | v78.11,40.64 78.22,40.76 v78.22,46.35 | v95.89,36.51 v95.89,23.5 | v73.34,69.22 v73.34,47.31 | v87.95,40.64 95.57,40.64 95.89,40.32 v95.89,39.69